# Altium PCB IO BOARD CERES.PcbDoc
Units mm, origin at the board's own origin, x right, y up, seen from the top; angles counter-clockwise.
Board outline 90 x 52 mm, 2 copper layers (Top Layer, Bottom Layer), stack 1.671 mm thick; 47 components, 30 nets, 158 pads, 0 vias.
Unrouted connection lines stored in the file: 6.
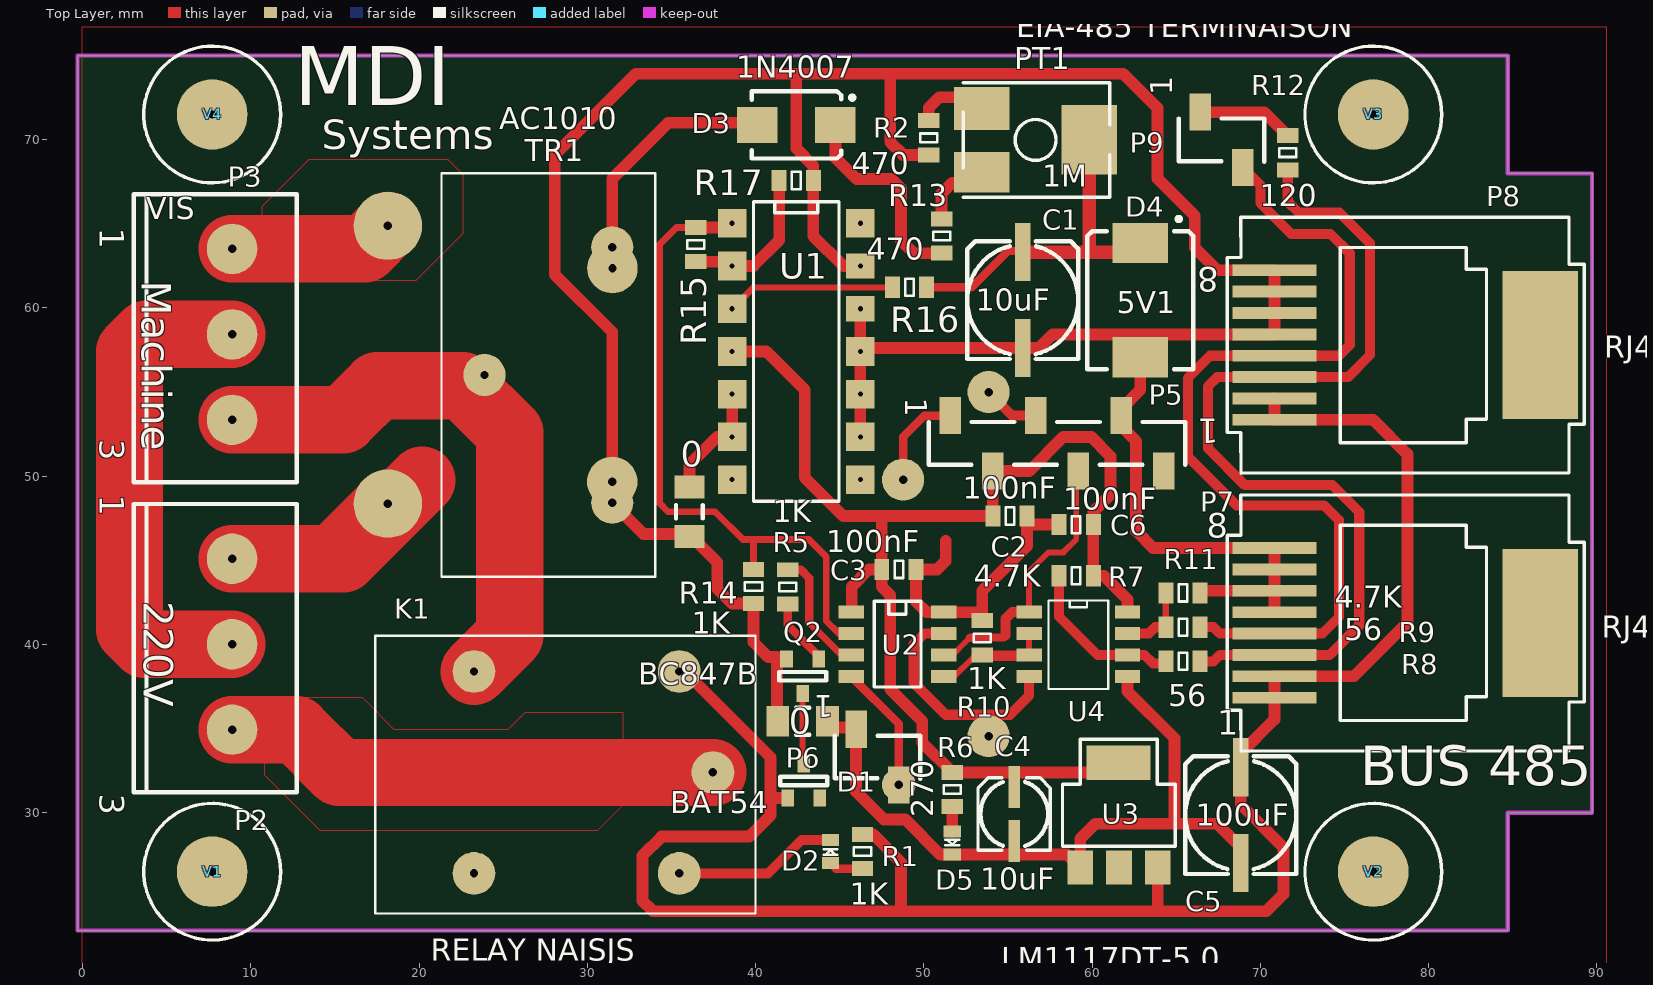
[diagram p0: Top Layer view]
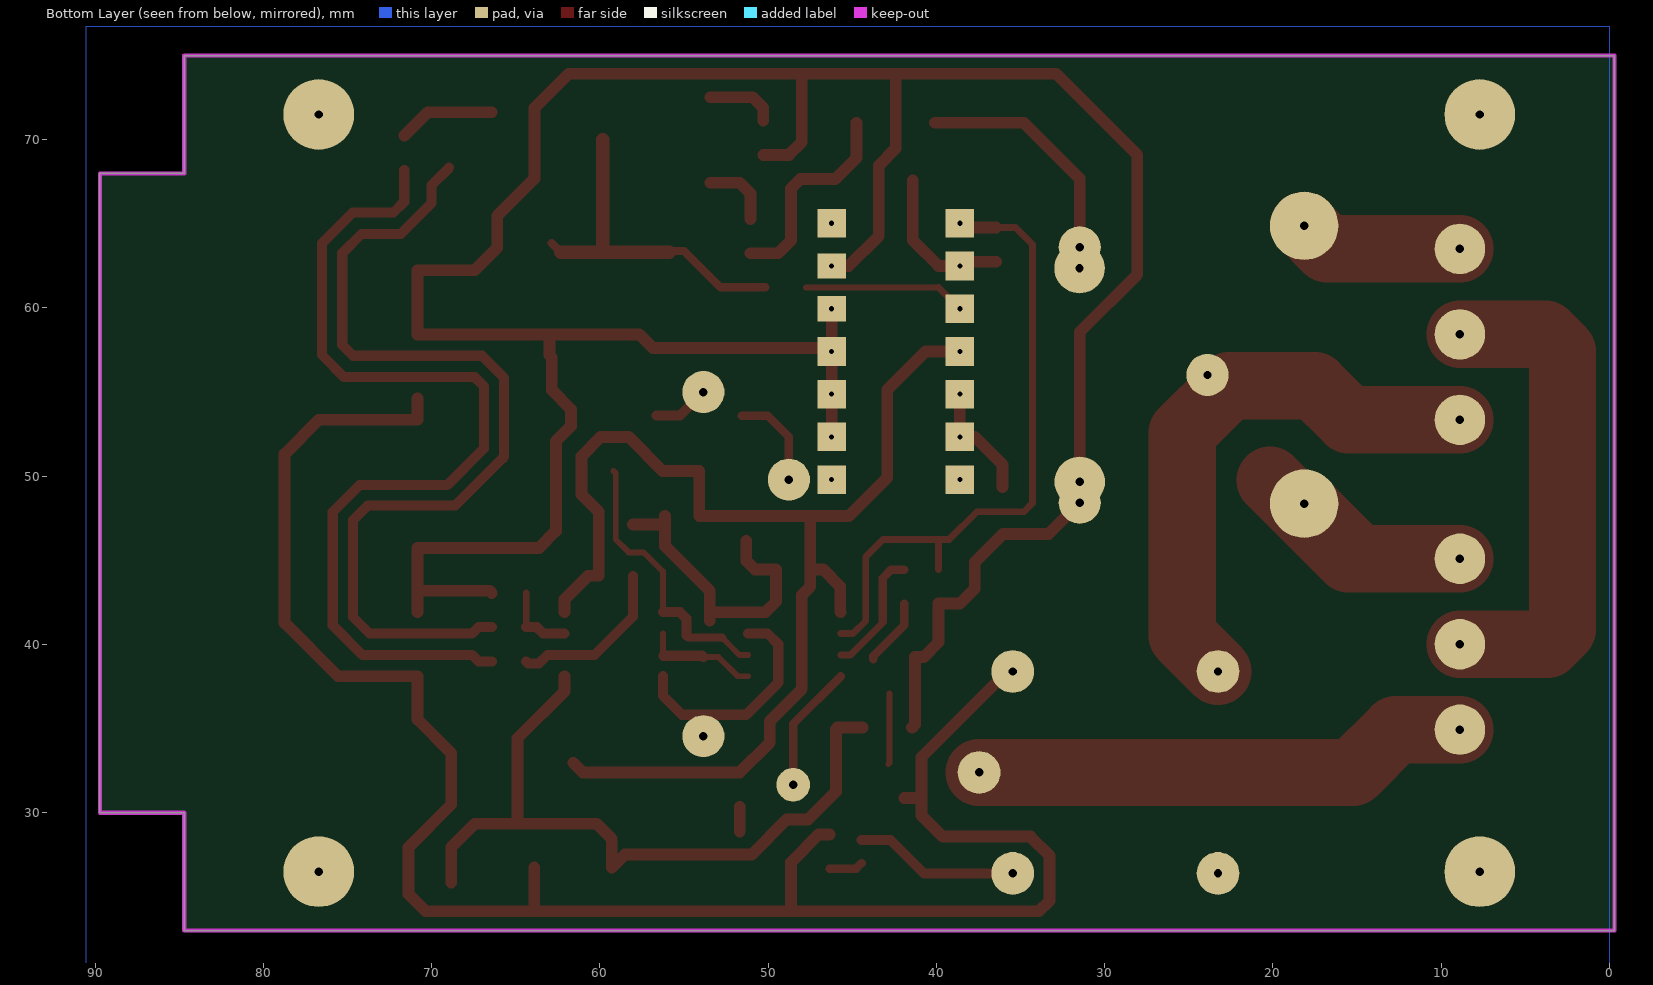
[diagram p1: Bottom Layer view, seen from below]
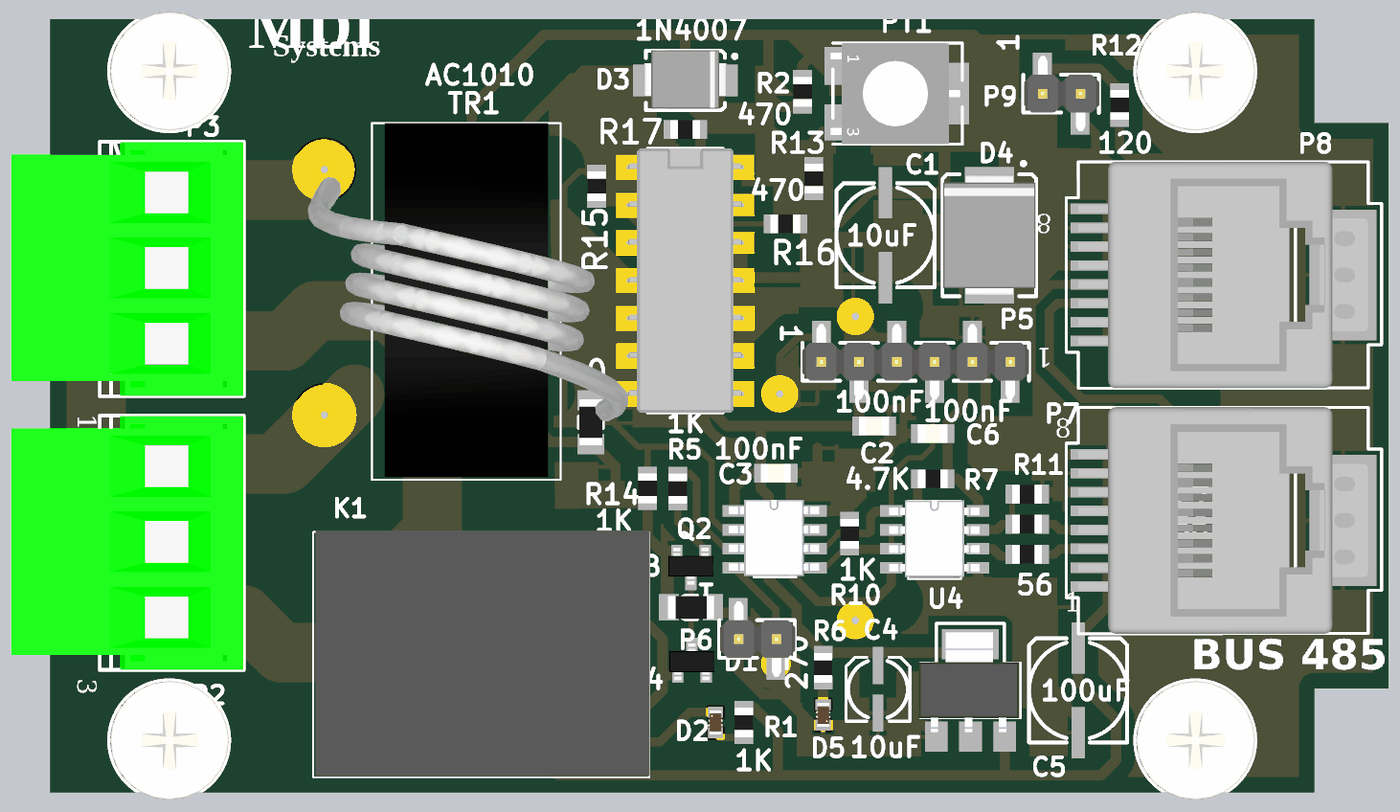
[diagram p2: 3D render of the assembled board from above, using the file's embedded part models]

## Layer stack, top to bottom
Top Solder: solder mask 0.0102, Solder Resist, Dk 3.5
Top Layer: signal copper 0.0356
Dielectric1: core 1.6, FR-4, Dk 4.8
Bottom Layer: signal copper 0.0356
Bottom Solder: solder mask 0.0102, Solder Resist, Dk 3.5

## Board outline
-0.291,22.987 -0.291,74.987 84.709,74.987 84.709,67.987 89.709,67.987 89.709,29.987 84.709,29.987 84.709,22.987

## Design rules (kind name [scope] priority, off if disabled: settings)
Clearance Clearance_3 [InNet('NetP3_3')] p1: gap=1
Clearance Clearance_2 [InPolygon vs (InComponent('Q1') OR InComponent('U1'))] p2: gap=1.3
Clearance Clearance_1 [InPolygon] p3: gap=0.9
Clearance [All] p4: gap=0.3
DiffPairsRouting [All] p1: maxlimit=0.9 minlimit=0.254 mostfreqgap=0.6 toplayer_minwidth=0.381 toplayer_maxwidth=2 toplayer_prefwidth=0.6 bottomlayer_minwidth=0.381 bottomlayer_maxwidth=2 bottomlayer_prefwidth=0.6 maxuncoupledlength=12.7
FabricationTestPointUsage TestPointUsage [All] p1: valid=0 allowmultiple=FALSE
FabricationTestpoint Testpoint [All] p1: side=3 testpointundercomponent=TRUE minsize=1.016 maxsize=2.54 preferedsize=1.524 minholesize=0 maxholesize=1.016 preferedholesize=0.813 testpointgrid=0.025 allowsidetop=TRUE allowsidebottom=TRUE usegrid=TRUE gridtolerance=0
HoleSize [All] p1: absolutevalues=TRUE maxlimit=5 minlimit=0.025 maxpercent=80.000 minpercent=20.000
MinimumSolderMaskSliver [All] p1: minsoldermaskwidth=0
PolygonConnect [All] p1: connectstyle=Relief reliefconductorwidth=0.254 reliefentries=4 polygonreliefangle="90 Angle" airgapwidth=0.254
RoutingVias [All] p1: holewidth=0.6 width=1.27 viastyle="Through Hole" minholewidth=0.5 minwidth=1.27 maxholewidth=0.9 maxwidth=1.27
SilkToSolderMaskClearance SilkscreenOverComponentPads [IsPad] p1: minsilkscreentomaskgap=0 clearancetoexposedcopper=TRUE
SolderMaskExpansion [All] p1: expansion=0
Width Width_4 [(InNet('D_N') OR InNet('D_P'))] p1: maxlimit=2 minlimit=0.254 preferedwidth=0.6
Width Width_3 [InNet('+5')] p2: maxlimit=2 minlimit=0.254 preferedwidth=0.7
Width Width_2 [InNet('3.3')] p3: maxlimit=2 minlimit=0.254 preferedwidth=0.7
Width Width_1 [InNet('+12')] p4: maxlimit=2 minlimit=0.254 preferedwidth=0.7
Width "Schematic Width Constraint" [InNet('GND')] p5: maxlimit=2 minlimit=0.254 preferedwidth=0.55
Width [All] p6: maxlimit=6 minlimit=0.254 preferedwidth=0.6
23 further rules are at their usual default settings.

## Classes and differential pairs
component class "U_RS485 IO": C4 C5 C6 D5 P7 P8 P9 R6 R7 R8 R9 R10 R11 R12 U3 U4
component class "U_MCU IO": C2 C3 P5 P6 R14 U2 V1 V2 V3 V4
component class U_IO: C1 D1 D2 D3 D4 K1 P2 P3 PT1 Q2 R1 R2 R5 R13 R15 R16 R17 TR1 U1
differential pair D: +D_P -D_N

## Components (designator, comment, footprint, x,y, rotation, side; value= is the part's Value field where it differs from the comment)
0 "Comment" 1206 42.799,35.433 r180 top
0 "Comment" 1206 36.068,47.879 r90 top
C1 "10uF" Kemet_63 55.88,60.452 r270 top
C2 "100nF" C0805 55.118,47.625 r180 top
C3 "100nF" C0805 48.514,44.45 r180 top
C4 "10uF" KEMET_4 55.372,29.921 r270 top
C5 "100uF" KEMET_63 68.834,29.845 r270 top
C6 "100nF" C0805 59.055,47.117 r180 top
D1 "BAT54" SOT23 42.862,31.877 r180 top
D2 "HSMH-C190" 0603-LEDR 44.45,27.686 r90 top
D3 "1N4007" DO214AA 42.418,70.866 r0 top
D4 "5V1" DO214AB 62.865,60.452 r270 top
D5 "HSMH-C190" 0603-LEDR 51.689,28.194 r270 top
K1 "RELAY NAISJS" RELAIG5L 37.465,32.385 r180 top
P2 "220VAC IN" CO3P508 8.89,45.085 r270 top
P3 "Alimentation Machine" CO3P508 8.89,63.5 r270 top
P5 "M20-8770642" M20_1X6 57.912,51.943 r0 top
P6 "Header 2" M20_1X2 47.244,33.303 r0 top
P7 "RJ45" MOLEX-RJ45_855135013 78.74,41.275 r180 top
P8 "RJ45" MOLEX-RJ45_855135013 78.74,57.785 r180 top
P9 "EIA-485 TERMINAISON" M20_1X2 67.691,69.977 r0 top
PT1 "1M" 3361P 56.642,69.977 r270 top
Q2 "BC847B" SOT23 42.799,38.1 r0 top
R1 "1K" R0805 46.355,27.686 r90 top
R2 "470" R0805 50.292,70.104 r270 top
R5 "1K" R0805 41.91,43.417 r90 top
R6 "270" R0805 51.689,31.369 r90 top
R7 "4.7K" R0805 59.055,44.069 r0 top
R8 "56" R0805 65.405,38.989 r0 top
R9 "56" R0805 65.405,41.021 r0 top
R10 "1K" R0805 53.467,40.386 r270 top
R11 "4.7K" R0805 65.405,43.053 r180 top
R12 "120" R0805 71.628,69.215 r270 top
R13 "470" R0805 51.054,64.262 r270 top
R14 "1K" R0805 39.878,43.434 r90 top
R15 "220K" R0805 36.449,63.754 r270 top
R16 "1K" R0805 49.149,61.214 r0 top
R17 "1K" R0805 42.418,67.564 r180 top
TR1 "AC1010" TR-AC10XX 27.686,56.007 r90 top
U1 "MCP6044-E/P" 14DIP300 38.608,65.024 r270 top
U2 "PIC12F1822/40" SO-8 45.682,41.91 r0 top
U3 "LM1117DT-5.0" SOT223 61.595,29.845 r0 top
U4 "ADM4851ARZ" SOIC8 59.182,40.005 r0 top
V1 "VIS" VIS42 7.709,26.487 r0 top
V2 "VIS" VIS42 76.709,26.487 r0 top
V3 "VIS" VIS42 76.709,71.487 r0 top
V4 "VIS" VIS42 7.709,71.487 r0 top

## Footprints (in the part's own frame and the unit in brackets; to place one, negate y for a bottom-side part, rotate by r counter-clockwise, add the part's x,y. Pads: shape width x height; smd on the part's side, far side on the other; paste and mask are expansions set on the pad)
14DIP300 [mm]
  rect 1.7x1.7 hole 0.3: 1(0,0) 2(2.54,0) 3(5.08,0) 4(7.62,0) 5(10.16,0) 6(12.7,0) 7(15.24,0) 8(15.24,7.62) 9(12.7,7.62) 10(10.16,7.62) 11(7.62,7.62) 14(0,7.62)
  rect 1.5x1.7 hole 0.3: 12(5.08,7.62) 13(2.54,7.62)
  silkscreen extent -1.27,1.27 16.51,6.35, body extent -1.27,0 16.51,7.62, height 3
0603-LEDR [mm]
  rect 0.725x1.016 smd paste+0 mask+0.12: 1(-0.69,0) 2(0.69,0)
  silkscreen extent -0.18,-0.41 0.13,0.41, body extent -0.8,-0.4 0.8,0.4, height 0.69
1206 [mm]
  rect 1.35x1.8 smd: 1(-1.475,0) 2(1.475,0)
  silkscreen extent -0.4,-0.8 0.4,0.8, body extent -1.55,-0.76 1.55,0.79, height 0.57
3361P [mm] "Résistance ajustable Bourns"
  rect 1.2x3.3 smd: 1(-2.54,-3.2) 2(0,3.2) 3(2.54,-3.2)
  silkscreen extent -3.4,-4.3 3.4,4.4, body extent -3.4,-4.45 3.4,4.25, height 4.88
C0805 [mil]
  rect 35x50 smd: 1(-40,0) 2(40,0)
  silkscreen extent -10,-20 10,20, body extent -39,-25 40,25, height 56
CO3P508 [mm]
  round 3 hole 0.5: 1(0,0) 2(5.08,0) 3(10.16,0)
  silkscreen extent -3.25,-5.84 13.87,3.84, body extent -3.22,-11.79 13.84,3.86, height 22.32
DO214AA [mm] "Molded Diode, 2-Leads, Body 5,4x3,6mm, IPC Medium Density"
  rect 2.4x2.15 smd: 1(-2.325,0) 2(2.325,0)
  silkscreen extent -2.65,-2 3.45,2, body extent -2.78,-1.9 2.79,2.03, height 2.32
DO214AB [mm] "Molded Diode, 2-Leads, Body 7,9x5,9mm, IPC Medium Density"
  rect 2.4x3.3 smd: 1(3.4,0) 2(-3.4,0)
  silkscreen extent -4.95,-3.15 4.1,3.15, body extent -4.05,-3.11 4.06,3.11, height 2.32
KEMET_4 [mm]
  rect 2.5x0.7 smd: 1(-1.6,0) 2(1.6,0)
  silkscreen extent -2.15,-2.15 2.15,2.15, body extent -2.6,-2.25 2.6,2.25, height 4.6
Kemet_63 [mm]
  rect 3.45x0.9 smd: 1(-2.85,0) 2(2.85,0)
  silkscreen extent -3.5,-3.3 3.5,3.3, body extent -3.5,-3.4 3.5,3.4, height 8.7
KEMET_63 [mm]
  rect 3.45x0.9 smd: 1(-2.85,0) 2(2.85,0)
  silkscreen extent -3.5,-3.3 3.5,3.3, body extent -3.5,-3.4 3.5,3.4, height 8.7
M20_1X2 [mm] "Connecteur Harwin_M20-8770242"
  rect 1.27x2.2 smd: 1(-1.27,1.65) 1(-1.27,1.65) 2(1.27,-1.65)
  silkscreen extent -2.54,-1.3 2.54,1.27, body extent -2.5,-2.54 2.58,2.54, height 9.95
M20_1X6 [mm] "Connecteur Harwin_M20-8770642"
  rect 1.27x2.2 smd: 1(-6.35,1.65) 1(-6.35,1.65) 2(-3.81,-1.65) 3(-1.27,1.65) 4(1.27,-1.65) 5(3.81,1.65) 6(6.35,-1.65)
  silkscreen extent -7.62,-1.27 7.62,1.27, body extent -7.62,-2.54 7.62,2.54, height 9.95
MOLEX-RJ45_855135013 [mm]
  rect 5x0.7 smd: 1(7.9,4.445) 2(7.9,3.175) 3(7.9,1.905) 4(7.9,0.635) 5(7.9,-0.635) 6(7.9,-1.905) 7(7.9,-3.175) 8(7.9,-4.445)
  rect 4.5x8.8 smd: 9(-7.9,0)
  silkscreen extent -10.5,-7.6 10.7,7.62, body extent -9.59,-7.62 9.89,7.62, height 12.87
R0805 [mil]
  rect 35x50 smd: 1(-40,0) 2(40,0)
  silkscreen extent -10,-20 10,20, body extent -39,-24 39,25, height 20
RELAIG5L [mm]
  round 2.54 hole 0.5: 1(0,0) 2(2,-6) 3(14.2,-6) 4(14.2,6) 5(2,6)
  silkscreen extent -2.54,-8.13 20.07,8.38, body extent -2.57,-8.2 19.93,8.3, height 19
SO-8 [mil]
  rect 59.1x30.3 smd: 1(0,0) 2(0,-50) 3(0,-100) 4(0,-150) 5(216.5,-150) 6(216.5,-100) 7(216.5,-50) 8(216.5,0)
  silkscreen extent 53,-175 163,26, body extent -13,-172 226,30, height 69
SOIC8 [mil]
  rect 59.1x30.3 smd: 1(-115,75) 2(-115,25) 3(-115,-25) 4(-115,-75) 5(115,-75) 6(115,-25) 7(115,25) 8(115,75)
  silkscreen extent -70,-105 70,102, body extent -120,-100 119,103, height 69
SOT23 [mil]
  rect 30x40 smd: 1(37.5,40) 2(-37.5,40) 3(0,-40)
  silkscreen extent -55,-10 55,10, body extent -60,-45 60,53, height 47
SOT223 [mil]
  rect 60x80 smd: 1(-90.6,-122.5) 2(0,-122.5) 3(90.6,-122.5)
  rect 150x80 smd: 4(-0.6,122.5)
  silkscreen extent -132,-73 132,177, body extent -137,-111 129,154, height 73
TR-AC10XX [mm]
  round 4.064 hole 0.5 mask+0.127: 1(-7.647,9.539) 2(8.863,9.539)
  round 2.5 hole 0.5 mask+0.127: 3(-7.593,-3.796) 4(7.593,-3.796) 5(0,3.796)
  silkscreen extent -11.99,-6.35 11.99,6.35, body extent -11.81,-10.85 11.99,10.64, height 28.33
VIS42 [mm]
  round 4.199 hole 0.5: 1(0,0)
  silkscreen extent -4.06,-4.06 4.06,4.06, body extent -3.97,-4 4.03,4, height 3.09

## Part data
C1 C5: library part "Cap Pol 100uF", "Polarized Capacitor"
C2 C3 C6: library part "Cap 0805 100nF", "Capacitor"
C4: library part "Cap Pol1", "Polarized Capacitor"
D1: "Schottky Barrier Diode"
D2 D5: "Surface Mount Chip LED, Red"
D3: library part D
D4: library part DZ
P2 P3: library part "Header 3", "Header, 3-Pin"
P5: library part "Header 6", "Header, 6-Pin"
P6: "Header, 2-Pin"
P7 P8: library part "Header 8", "Header, 8-Pin"
P9: library part "Header 2", "Header, 2-Pin"
PT1: library part RV
Q2: library part "NPN SOT23"
R1 R5 R6 R10 R14 R15 R16 R17: library part "Resistor 0805 1K", "Resistor"
R2 R13: library part R
R7 R11: library part "Resistor 0805 4.7K", "Resistor"
R8 R9: library part "Resistor 0805 56", "Resistor"
R12: library part "Resistor 0805 120", "Resistor"
U1: "600 nA, Rail-to-Rail Input/Output Operational Amplifier, 14-Pin PDIP, Extended Temperature"
U2: library part PIC18(L)F22/40, "PIC12F1822/40-I/SN - MICRO 8 BITS FLASH 8SOIC2K 2K 4K"
U3: "800mA Low-Dropout Linear Regulator, 3-pin TO-252"
U4: library part MAX485ESA, "Low-Power, Slew-Rate-Limited RS-485/RS-422 Transceiver"

## Free pads (board coordinates)
  round 3 hole 0.5: 0(31.482,49.657) 0(31.496,62.357)
  round 2.5 hole 0.5: 0(53.848,34.544) 1(53.848,54.991) 4(48.768,49.784)
  rect 3.3x1.6 smd: 1(53.442,71.374) 2(53.442,68.453) 3(59.842,71.247) 4(59.842,68.707)
  round 2 hole 0.5: 3(48.514,31.653)

## Nets (pads, with @x,y where several pads share a name; then routed paths per layer and width w, separated by ;. In a path a pad name is that pad's centre, name@x,y a point inside that pad or via, vN(x,y) a via of type N, cw(c..) or ccw(c..) an arc to the next point about the centre after c; other vN are vias at no path point)
+5: C2.2 C3.2 C4.1 C6.1 P5.2 R6.2 R7.2 U1.4 U2.1 U3.4 U4.8 | length 75.4
  Top Layer w0.7: U1.4 40.64,57.404 42.926,55.118 42.926,49.911 45.212,47.625 45.974,47.625 47.371,47.625 ; U2.1 45.72,41.948 45.72,43.434 46.736,44.45 C3.2 ; U3.4 61.008,32.385 R6.2 49.911,34.163 49.911,35.433 48.006,37.338 48.006,42.926 47.498,43.434 C3.2 ; U4.8 62.103,42.672 60.706,44.069 R7.2 C6.1 60.071,47.879 61.087,48.895 61.087,51.181 59.944,52.324 58.293,52.324 56.262,50.293 P5.2 C2.2 47.371,47.625 ; 47.371,47.625 47.498,47.498 C3.2
+12: C5.1 D1.1 K1.2 P7.1 P7.2 P8.1 P8.2 R1.2 U3.3 | length 114.7
  Top Layer w0.7: K1.2 35.783,38.385 40.894,33.274 40.894,30.861 ; D1.1 40.894,30.861 ; R1.2 46.99,28.702 48.641,27.051 48.641,24.13 ; U3.3 63.896,24.145 63.881,24.13 ; P8.2 P8.1 76.708,53.34 78.74,51.308 78.74,41.275 75.565,38.1 P7.2 P7.1 70.84,35.534 68.834,33.528 C5.1 68.834,30.48 71.374,27.94 71.374,25.146 70.358,24.13 63.881,24.13 ; 40.894,30.861 40.894,29.845 39.624,28.575 34.417,28.575 33.274,27.432 33.274,24.765 33.909,24.13 48.641,24.13 ; 48.641,24.13 63.881,24.13
D_N: P7.3 P8.3 R8.2 R12.2 | length 56.2
  Top Layer w0.6: R8.2 67.213,38.989 67.593,39.37 P7.3 74.117,39.37 75.876,41.129 75.876,47.868 74.636,49.109 74.284,49.46 69.077,49.46 66.889,51.649 66.889,55.332 67.437,55.88 67.974,55.88 P8.3 75.202,55.88 76.511,57.189 76.511,63.842 74.694,65.659 72.263,65.659 71.628,66.294 R12.2
D_P: P7.4 P8.4 P9.2 R9.2 | length 54.8
  Top Layer w0.6: R9.2 67.213,41.021 67.594,40.64 P7.4 73.69,40.64 74.676,41.626 74.676,47.371 73.787,48.26 68.58,48.26 66.04,50.8 65.689,51.151 65.689,55.829 66.04,56.18 67.01,57.15 P8.4 74.676,57.15 75.311,57.785 75.311,63.246 74.168,64.389 71.836,64.389 70.007,66.218 70.007,67.281 P9.2
GND: 0.1 0.2 C1.2 C2.1 C3.1 C4.2 C5.2 C6.2 D4.1 D5.2 P5.5 P6.1 P7.5 P7.6 P7.7 P7.8 P8.5 P8.6 P8.7 P8.8 pad.0@31.482,49.657 Q2.2 R2.2 R10.1 R11.1 R14.1 R17.1 TR1.3 U1.5 U1.6 U1.9 U1.10 U1.11 U1.12 U1.13 U2.8 U3.1 U4.5 | length 251.9
  Top Layer w0.7: 0.2@36.068,49.354 36.068,50.673 37.719,52.324 U1.6 U1.5 ; 0.2@41.451,35.052 41.275,35.228 41.275,39.243 40.767,39.243 39.878,40.132 R14.1 38.608,42.418 37.719,43.307 37.719,44.88 36.041,46.558 33.338,46.558 TR1.3 31.482,58.561 28.067,61.976 28.067,69.088 32.893,73.914 42.418,73.914 ; 0.1@44.401,35.052 45.875,35.052 45.974,34.953 45.974,31.242 47.625,29.591 48.895,29.591 50.982,27.504 D5.2 58.523,27.504 U3.1 59.294,28.433 60.198,29.337 64.897,29.337 ; U1.9 U1.10 U1.11 ; U1.12 U1.11 ; U1.13 45.212,62.484 43.434,64.262 R17.1 43.434,68.453 42.418,69.469 42.418,73.914 ; R2.2 48.768,69.088 48.006,69.85 48.006,73.914 ; 51.308,46.15 51.308,44.958 50.8,44.45 C3.1 49.53,42.545 50.165,41.91 U2.8 53.467,41.91 ; R10.1 53.467,41.91 ; C2.1@56.134,47.117 C6.2 ; C2.1 56.134,45.847 53.467,43.18 53.467,41.91 ; U4.5 62.103,37.211 64.897,34.417 64.897,29.337 ; R11.1 66.548,43.18 P7.6 ; C5.2@68.834,25.852 68.834,27.94 67.437,29.337 64.897,29.337 ; P7.5 P7.6 ; 42.418,73.914 48.006,73.914 ; U1.11 46.426,57.602 C1.2 56.84,57.602 57.658,58.42 62.992,58.42 ; 48.006,73.914 61.849,73.914 63.881,71.882 63.881,67.691 66.103,65.468 66.103,63.563 67.437,62.23 P8.8 P8.7 P8.6 P8.5 62.992,58.42 ; 62.992,58.42 62.992,57.179 D4.1 62.865,55.118 61.722,53.975 P5.5 61.722,52.959 62.611,52.07 62.611,46.736 63.627,45.72 P7.8 P7.7 P7.6
M\C\L\R: P5.1 P6.2 pad.3@48.514,31.653 pad.4@48.768,49.784 U2.4 | length 13.5
  Top Layer w0.5: U2.4 48.514,35.268 P6.2 ; pad.4@48.768,49.784 48.768,52.324 50.037,53.593 P5.1@51.562,53.593
NetC1_1: C1.1 D4.2 pad.3@59.842,71.247 pad.4@59.842,68.707 PT1.2 R16.2 | length 20.6
  Top Layer w0.5: R16.2 52.832,61.214 54.991,63.373 55.809,63.373 C1.1 ; 59.69,63.302 59.842,63.454 ; D4.2@62.315,63.302 D4.2
  Top Layer w0.8: C1.1 59.69,63.302 D4.2@62.315,63.302 ; 59.842,63.454 PT1.2
NetD1_3: D1.3 D2.2 K1.5 Q2.3 | length 14.2
  Top Layer w0.35: Q2.3 42.799,32.957 D1.3 ; D2.2@44.323,28.503 D2.2
  Top Layer w0.6: K1.5 40.736,26.385 42.727,28.376 D2.2
NetD2_1: D2.1 R1.1 | length 2
  Top Layer w0.5: D2.1 44.776,26.67 R1.1
NetD3_1: D3.1 pad.0@31.496,62.357 TR1.4 | length 14.1
  Top Layer w0.7: TR1.4 31.482,67.677 34.798,70.993 D3.1@40.093,70.993
NetD3_2: D3.2 R13.2 | length 12.5
  Top Layer w0.7: D3.2@44.743,70.993 44.743,68.922 46.018,67.647 48.089,67.647 48.641,67.095 48.641,64.008 49.403,63.246 R13.2
NetD5_1: D5.1 R6.1 | length 1.5
  Top Layer w0.7: D5.1 R6.1
NetK1_1: K1.1 P2.3 | length 29.6
  Top Layer w4: P2.3 12.7,34.925 15.24,32.385 K1.1
NetK1_3: K1.3 P3.3 | length 33.6
  Top Layer w4: P3.3 15.494,53.34 17.526,55.372 22.606,55.372 25.4,52.578 25.4,40.52 K1.3
NetP2_1: P2.1 TR1.1 | length 20
  Top Layer w4: P2.1 14.873,45.085 TR1.1 ; 12.7,45.085 15.508,45.085 20.179,49.757
NetP3_1: P3.1 TR1.2 | length 9.8
  Top Layer w4: P3.1 16.778,63.5 TR1.2
NetP9_1: P9.1 R12.1 | length 5.8
  Top Layer w0.7: P9.1@66.421,71.627 70.232,71.627 R12.1
NetPT1_1: pad.1@53.442,71.374 PT1.1 R2.1 | length 4.2
  Top Layer w0.7: R2.1 50.292,71.882 50.927,72.517 PT1.1
NetPT1_3: pad.2 PT1.3 R13.1 | length 4.2
  Top Layer w0.7: R13.1 51.054,66.802 51.689,67.437 PT1.3
NetQ2_1: Q2.1 R5.1 | length 4
  Top Layer w0.5: R5.1 41.91,41.148 43.751,39.307 Q2.1
NetR5_2: R5.2 U2.3 | length 7.4
  Top Layer w0.4: 43.18,41.335 43.18,41.299 45.109,39.37 U2.3
  Top Layer w0.5: R5.2 42.689,44.433 43.18,43.942 43.18,41.335
NetR7_1: R7.1 R8.1 U4.6 | length 10
  Top Layer w0.6: R7.1 58.039,41.656 60.325,39.37 U4.6 63.119,39.37 63.627,38.862 64.262,38.862 R8.1
NetR9_1: R9.1 R11.2 U4.7 | length 4.5
  Top Layer w0.381: R9.1 R11.2
  Top Layer w0.6: U4.7 63.373,40.64 63.754,41.021 R9.1
NetR10_2: R10.2 U2.5 U4.2 U4.3 | length 6.9
  Top Layer w0.35: U2.5 51.816,38.1 52.959,39.243 R10.2@53.848,39.243 ; U4.3@56.21,39.319 U4.3 U4.2
  Top Layer w0.6: R10.2@53.848,39.243 53.924,39.319 U4.3@56.21,39.319
NetR14_2: R14.2 R15.1 U1.1 U2.2 | length 38.8
  Top Layer w0.4: R15.1 35.306,64.77 34.29,63.754 34.29,48.387 34.798,47.879 37.592,47.879 39.243,46.228 39.878,46.228 ; R14.2 39.878,46.228 ; U2.2 44.958,40.64 44.196,41.402 44.196,45.212 43.18,46.228 39.878,46.228
  Top Layer w0.7: R15.1 38.354,64.77 U1.1
NetR15_2: R15.2 R17.2 U1.2 | length 9.2
  Top Layer w0.7: R15.2 38.354,62.738 U1.2 39.878,62.484 41.402,64.008 R17.2
NetR16_1: R16.1 U1.3 | length 9.7
  Top Layer w0.35: 39.878,61.214 R16.1@47.752,61.214
  Top Layer w0.4: U1.3 39.878,61.214
PGEC1: P5.4 U2.6 U4.1 | length 16.8
  Top Layer w0.35: U2.6 51.718,39.37 52.451,40.103 ; 52.45,40.104 52.722,40.376 ; U4.1 56.261,44.323 57.404,45.466 58.293,45.466 59.055,46.228 59.055,50.166 P5.4
  Top Layer w0.5: 52.722,40.376 52.753,40.407 54.758,40.407 54.864,40.513
  Top Layer w0.6: 54.864,40.513 54.864,41.529 55.245,41.91 U4.1
PGED1: P5.3 pad.0@53.848,34.544 pad.1@53.848,54.991 U2.7 U4.4 | length 17
  Top Layer w0.6: U2.7 50.038,40.64 49.403,40.005 49.403,37.719 51.308,35.814 55.118,35.814 56.261,36.957 U4.4 ; pad.1@53.848,54.991 55.245,53.594 P5.3 P5.3
TERRE: P2.2 P3.2 | length 29.5
  Top Layer w4: P2.2 7.874,40.005 3.683,40.005 2.794,40.894 2.794,57.404 3.81,58.42 P3.2
pads on no net: D1.2 K1.4 P5.6 P7.9 P8.9 TR1.5 U1.7 U1.8 U1.14 U3.2 V1.1 V2.1 V3.1 V4.1

## Polygon pours and split planes (outlines as drawn)
GND on Bottom Layer "Top Layer-No Net1" (solid, remove dead copper, shelved, pour order 7): 0,0 0,76.708 90.551,76.708 90.551,0
GND on Top Layer "Top Layer-No Net" (solid, remove dead copper, shelved, pour order 5): 0,0 0,76.708 90.551,76.708 90.551,0
NetK1_1 on Top Layer "Mid-Layer 1-No Net" (solid, remove dead copper, shelved, pour order 8): 10.922,35.179 10.795,35.052 10.795,33.274 10.795,32.258 14.097,28.956 30.099,28.956 30.607,28.956 32.131,30.48 32.131,35.941 26.289,35.941 25.4,35.052 25.273,34.925 19.304,34.925 18.542,34.925 16.764,36.703 16.637,36.83 12.319,36.83
no net on Top Layer "Mid-Layer 1-No Net" (solid, remove dead copper, shelved, pour order 6): 10.668,61.595 10.668,66.04 13.462,68.834 21.717,68.834 22.606,67.945 22.606,64.389 19.812,61.595

## Keep-outs
Keep-Out Layer:
  the board outline again, w0.254

## Other copper
Top Layer:
  pour cut-out: 33.147,74.168 33.655,42.037 40.767,42.164 40.767,23.876 0.254,23.749 0.254,74.168
  text "CUIVRE TOP" at 179.989,-113.157 h4
Bottom Layer:
  text "CUIVRE BOTTOM" at -51.532,-113.792 h4

## Silkscreen, mask and mechanical layers (free items; w line width, h text height)
Top Overlay:
  text "MDI" at 12.573,70.866 h6
  text "Systems" at 14.224,68.834 h3
  text "Machine" at 2.921,61.595 h3 r270
  text "220V" at 3.048,42.545 h3 r270
  text "BUS 485" at 75.946,30.861 h4
  text "I/O BOARD" at 36.449,16.637 h4
  text "PLAN D'EQUIPEMENT TOP" at 180.116,-113.157 h4
Bottom Overlay:
  text "PLAN D'EQUIPEMENT BOTTOM" at -34.514,-113.792 h4
  text ".Layer_Name" at 2.189,-122.682 h2
Top Paste:
  text "PATE A BRASER TOP" at 180.37,-113.411 h4
Bottom Paste:
  text "PATE A BRASER BOTTOM" at -34.768,-113.792 h4
Top Solder:
  text "VERNIS EPARGNE TOP" at 180.116,-113.411 h4
Bottom Solder:
  text "VERNIS EPARGNE BOTTOM" at -38.705,-114.046 h4
Drill Guide:
  lines w0.254: 7.709,26.487 76.709,26.487 76.709,71.487 7.709,71.487 7.709,26.487
Fond de plan Bottom:
  circle w0.127: c37.442,-88.392 r2
  circle w0.127: c37.442,-88.392 r3
  lines w0.127: -127.351,-61.468 -122.271,-61.468 ; -127.351,9.017 -122.271,9.017 ; -127.351,79.502 -122.271,79.502 ; -105.304,-127.037 -105.304,-117.032 ; -78.075,-131.953 -78.075,-126.873 ; -78.075,144.907 -78.075,149.987 ; -28.799,-131.953 -28.799,-126.873 ; -28.799,144.907 -28.799,149.987 ; -8.306,-117.032 -8.306,-102.037 ; 20.35,-131.953 20.35,-126.873 ; 20.35,144.907 20.35,149.987 ; 22.702,-121.774 66.863,-121.774 ; 22.702,-117.017 66.863,-117.017 ; 22.702,-112.272 66.863,-112.272 ; 22.702,-107.528 66.863,-107.528 ; 22.702,-103.189 66.832,-103.189 ; 33.685,-88.392 43.291,-88.392 ; 37.442,-92.06 37.442,-84.711 ; 37.699,-127.037 37.699,-103.189 ; 44.353,-88.392 46.766,-88.392 ; 47.782,-88.392 60.055,-88.392 ; 52.693,-127.037 52.693,-103.189 ; 69.499,-131.953 69.499,-126.873 ; 69.499,144.907 69.499,149.987 ; 118.775,-131.953 118.775,-126.873 ; 118.775,144.907 118.775,149.987 ; 167.924,-131.953 167.924,-126.873 ; 167.924,144.907 167.924,149.987 ; 217.073,-131.953 217.073,-126.873 ; 217.073,144.907 217.073,149.987 ; 261.269,-61.468 266.349,-61.468 ; 261.269,9.017 266.349,9.017 ; 261.269,79.502 266.349,79.502 ; -127.351,-131.953 -127.351,149.987 266.349,149.987 266.349,-131.953 -127.351,-131.953 ; -122.271,-126.873 -122.271,144.907 261.269,144.907 261.269,-126.873 -122.271,-126.873 ; 50.056,-91.392 57.055,-90.392 57.055,-86.392 50.055,-85.392 50.056,-91.392
  lines w0.5: -122.297,-117.032 22.702,-117.032 ; -122.297,-102.037 22.702,-102.037 ; -122.297,-93.295 22.702,-93.295 66.862,-93.295 ; -36.906,-127.037 -36.906,-117.032 ; -22.296,-117.032 -22.296,-102.037 ; -22.296,-107.04 22.702,-107.04 ; -22.198,-112.043 5.696,-112.043 22.702,-112.043 ; 5.696,-117.032 5.696,-102.037 ; 22.702,-127.037 22.702,-73.022 ; 22.702,-103.189 66.578,-103.189 ; 22.702,-98.458 66.578,-98.458 ; 22.702,-83.489 66.862,-83.488 ; 37.699,-103.189 37.699,-98.509 ; 52.693,-103.189 52.693,-98.5 ; -122.297,-127.037 66.863,-127.022 66.862,-73.007 -122.297,-73.022 -122.297,-127.037
  text "8" at -102.129,146.558 h1.78
  text "7" at -53.107,146.558 h1.78
  text "6" at -3.577,146.558 h1.78
  text "5" at 45.445,146.558 h1.78
  text "4" at 94.721,146.558 h1.78
  text "3" at 144.014,146.558 h1.78
  text "2" at 193.273,146.558 h1.78
  text "1" at 242.312,146.558 h1.78
  text "A" at -124.176,112.573 h1.78
  text "A" at 264.444,112.573 h1.78
  text "B" at -124.176,41.961 h1.78
  text "B" at 264.444,41.961 h1.78
  text "C" at -124.176,-28.651 h1.78
  text "C" at 264.444,-28.651 h1.78
  text "ECHELLE : 1" at 64.546,-78.994 h3
  text "MDI" at -46.355,-82.55 h8
  text "Systems" at -47.879,-86.614 h4
  text "MODIFICATIONS" at 52.862,-96.774 h3
  text "Ce document est la propriété de MDI System" at -29.307,-96.901 h3
  text "D" at -124.176,-98.755 h1.78
  text "D" at 264.444,-98.755 h1.78
  text "Il ne peut être reproduit ou communiqué sans son autorisation" at -15.718,-100.457 h3
  text "Visa" at 32.923,-101.6 h3
  text "Date" at 47.782,-101.6 h3
  text "Indice" at 62.895,-101.6 h3
  text "NOM" at 1.681,-105.537 h3
  text "DATE" at -11.282,-105.664 h3
  text "DESIGNATION : I/O BOARD" at -24.363,-106.807 h4
  text "Etablie" at 17.937,-110.363 h3
  text "13/09/13" at -11.028,-110.617 h2.5
  text "SB" at 0.529,-110.998 h3
  text "Vérifiée" at 18.445,-115.443 h3
  text "MATIERE :" at 19.325,-120.015 h3
  text "FEUILLE" at -109.825,-120.396 h3
  text "N°" at -38.197,-123.698 h6
  text "1/1" at -112.492,-124.841 h1.3
  text "8" at -102.129,-130.302 h1.78
  text "7" at -53.107,-130.302 h1.78
  text "6" at -3.577,-130.302 h1.78
  text "5" at 45.445,-130.302 h1.78
  text "4" at 94.721,-130.302 h1.78
  text "3" at 144.014,-130.302 h1.78
  text "2" at 193.273,-130.302 h1.78
  text "1" at 242.312,-130.302 h1.78
Fond de plan:
  circle w0.127: c101.555,-88.392 r2
  circle w0.127: c101.555,-88.392 r3
  lines w0.127: -127.351,-61.468 -122.271,-61.468 ; -127.351,9.017 -122.271,9.017 ; -127.351,79.502 -122.271,79.502 ; -78.075,-131.953 -78.075,-126.873 ; -78.075,144.907 -78.075,149.987 ; -28.926,-131.953 -28.926,-126.873 ; -28.926,144.907 -28.926,149.987 ; 20.223,-131.953 20.223,-126.873 ; 20.223,144.907 20.223,149.987 ; 69.499,-131.953 69.499,-126.873 ; 69.499,144.907 69.499,149.987 ; 72.135,-121.774 116.295,-121.774 ; 72.135,-117.017 116.295,-117.017 ; 72.135,-112.272 116.295,-112.272 ; 72.135,-107.528 116.295,-107.528 ; 72.166,-103.189 116.295,-103.189 ; 78.942,-88.392 91.216,-88.392 ; 86.304,-127.037 86.304,-103.189 ; 92.232,-88.392 94.645,-88.392 ; 95.706,-88.392 105.313,-88.392 ; 101.299,-127.037 101.299,-103.189 ; 101.555,-92.06 101.555,-84.711 ; 118.648,-131.953 118.648,-126.873 ; 118.648,144.907 118.648,149.987 ; 147.304,-117.032 147.304,-102.037 ; 167.797,-131.953 167.797,-126.873 ; 167.797,144.907 167.797,149.987 ; 217.073,-131.953 217.073,-126.873 ; 217.073,144.907 217.073,149.987 ; 244.301,-127.037 244.301,-117.032 ; 261.269,-61.468 266.349,-61.468 ; 261.269,9.017 266.349,9.017 ; 261.269,79.502 266.349,79.502 ; -127.351,-131.953 266.349,-131.953 266.349,149.987 -127.351,149.987 -127.351,-131.953 ; -122.271,-126.873 261.269,-126.873 261.269,144.907 -122.271,144.907 -122.271,-126.873 ; 81.942,-90.392 81.942,-86.392 88.942,-85.392 88.942,-91.392 81.942,-90.392
  lines w0.5: 72.136,-93.295 116.295,-93.295 261.294,-93.295 ; 72.136,-83.488 116.295,-83.489 ; 72.419,-103.189 116.295,-103.189 ; 72.419,-98.458 116.295,-98.458 ; 86.304,-103.189 86.304,-98.5 ; 101.299,-103.189 101.299,-98.509 ; 116.295,-127.037 116.295,-73.022 ; 116.295,-117.032 261.294,-117.032 ; 116.295,-112.043 133.301,-112.043 161.195,-112.043 ; 116.295,-107.04 161.294,-107.04 ; 116.295,-102.037 261.294,-102.037 ; 133.301,-117.032 133.301,-102.037 ; 161.294,-117.032 161.294,-102.037 ; 180.095,-127.037 180.095,-117.032 ; 72.135,-127.022 72.135,-73.007 261.294,-73.022 261.294,-127.037 72.135,-127.022
  text "1" at -103.314,146.558 h1.78
  text "2" at -54.275,146.558 h1.78
  text "3" at -5.016,146.558 h1.78
  text "4" at 44.277,146.558 h1.78
  text "5" at 93.553,146.558 h1.78
  text "6" at 142.575,146.558 h1.78
  text "7" at 192.105,146.558 h1.78
  text "8" at 241.127,146.558 h1.78
  text "A" at -125.446,112.573 h1.78
  text "A" at 263.174,112.573 h1.78
  text "B" at -125.446,41.961 h1.78
  text "B" at 263.174,41.961 h1.78
  text "C" at -125.446,-28.651 h1.78
  text "C" at 263.174,-28.651 h1.78
  text "ECHELLE : 1" at 74.325,-79.121 h3
  text "MDI" at 175.895,-81.788 h8
  text "Systems" at 177.673,-86.106 h4
  text "MODIFICATIONS" at 86.009,-96.901 h3
  text "Ce document est la propriété de MDI System" at 168.305,-96.901 h3
  text "D" at -125.446,-98.755 h1.78
  text "D" at 263.174,-98.755 h1.78
  text "Il ne peut être reproduit ou communiqué sans son autorisation" at 154.716,-100.457 h3
  text "Indice" at 76.103,-101.6 h3
  text "Date" at 91.216,-101.6 h3
  text "Visa" at 106.075,-101.6 h3
  text "NOM" at 137.317,-105.537 h3
  text "DATE" at 150.28,-105.664 h3
  text "DESIGNATION : I/O BOARD" at 163.361,-106.807 h4
  text "Etablie" at 121.061,-110.363 h3
  text "13/09/13" at 150.026,-110.617 h2.5
  text "SB" at 138.469,-110.998 h3
  text "Vérifiée" at 120.553,-115.443 h3
  text "MATIERE :" at 119.673,-120.015 h3
  text "FEUILLE" at 248.823,-120.396 h3
  text "N°" at 183.037,-123.444 h6
  text "1/1" at 251.49,-124.841 h1.3
  text "1" at -103.314,-130.302 h1.78
  text "2" at -54.275,-130.302 h1.78
  text "3" at -5.016,-130.302 h1.78
  text "4" at 44.277,-130.302 h1.78
  text "5" at 93.553,-130.302 h1.78
  text "6" at 142.575,-130.302 h1.78
  text "7" at 192.105,-130.302 h1.78
  text "8" at 241.127,-130.302 h1.78
Drill Drawing:
  lines w0.15: 180.598,95.135 180.598,98.635 183.718,98.635 183.718,95.135 180.598,95.135 ; 187.098,84.635 187.098,88.135 190.218,88.135 190.218,84.635 187.098,84.635 ; 187.598,95.135 190.718,95.135 190.718,98.635 187.598,98.635 187.598,95.135 ; 194.478,114.135 197.598,114.135 197.598,117.635 194.478,117.635 194.478,114.135 ; 194.978,104.635 198.098,104.635 198.098,108.135 194.978,108.135 194.978,104.635 ; 196.478,95.135 196.478,98.635 199.598,98.635 199.598,95.135 196.478,95.135 ; 200.098,84.635 203.218,84.635 203.218,88.135 200.098,88.135 200.098,84.635 ; 203.978,114.135 207.098,114.135 207.098,117.635 203.978,117.635 203.978,114.135 ; 205.478,124.135 205.478,127.635 208.598,127.635 208.598,124.135 205.478,124.135 ; 205.598,95.135 205.598,98.635 208.718,98.635 208.718,95.135 205.598,95.135 ; 207.978,104.635 207.978,108.135 211.098,108.135 211.098,104.635 207.978,104.635 ; 209.478,124.135 212.598,124.135 212.598,127.635 209.478,127.635 209.478,124.135 ; 213.478,124.135 216.598,124.135 216.598,127.635 213.478,127.635 213.478,124.135 ; 213.978,114.135 217.098,114.135 217.098,117.635 213.978,117.635 213.978,114.135 ; 214.098,95.135 214.098,98.635 217.218,98.635 217.218,95.135 214.098,95.135 ; 217.478,124.135 220.598,124.135 220.598,127.635 217.478,127.635 217.478,124.135 ; 221.478,124.135 224.598,124.135 224.598,127.635 221.478,127.635 221.478,124.135 ; 222.098,95.135 222.098,98.635 225.218,98.635 225.218,95.135 222.098,95.135 ; 223.978,114.135 223.978,117.635 227.098,117.635 227.098,114.135 223.978,114.135 ; 227.598,84.635 230.718,84.635 230.718,88.135 227.598,88.135 227.598,84.635 ; 234.598,84.635 234.598,88.135 237.718,88.135 237.718,84.635 234.598,84.635 ; 242.098,84.635 242.098,88.135 245.218,88.135 245.218,84.635 242.098,84.635 ; 249.098,96.635 252.218,96.635 252.218,100.135 249.098,100.135 249.098,96.635 ; 249.098,102.135 252.218,102.135 252.218,105.635 249.098,105.635 249.098,102.135 ; 249.098,107.635 252.218,107.635 252.218,111.135 249.098,111.135 249.098,107.635 ; 249.098,113.135 249.098,116.635 252.218,116.635 252.218,113.135 249.098,113.135
  lines w0.5: 165.958,82.135 165.956,139.05 255.598,139.135 255.598,82.135 166.307,82.135 ; 166.307,92.635 255.598,92.635 ; 166.307,112.635 229.098,112.635 ; 166.307,122.25 255.598,122.25 ; 166.307,130.25 255.598,130.25 ; 188.598,112.635 188.598,122.135 ; 188.598,122.25 188.598,130.25 ; 229.307,92.635 229.307,122.25 229.307,130.25
  text "Spécification du circuit imprimé" at 185.098,134.635 h5
  text "Process de Fabrication : RoHS" at 196.098,131.635 h3
  text "Ep. CI.:" at 234.598,125.635 h3
  text "1,6mm" at 242.598,125.635 h3
  text "Nbre de couches :" at 167.098,125.135 h3
  text "2" at 185.598,125.135 h3
  text "2" at 206.348,124.885 h4
  text "4" at 214.298,124.835 h4
  text "5" at 218.498,124.835 h4
  text "6" at 222.398,124.835 h4
  text "3" at 210.498,124.735 h4
  text "CLASSE :" at 193.098,124.635 h4
  text "X" at 210.098,124.435 h3
  text "Epaiss. cuivre de base" at 196.098,119.135 h3
  text "FINITION :" at 238.098,118.635 h3
  text "MATIERE :" at 169.498,118.135 h3
  text "FR4" at 180.598,118.135 h3
  text "HTg : Tg  140° C" at 169.498,115.435 h3
  text "35µ" at 190.098,115.135 h3
  text "70µ" at 199.598,115.135 h3
  text "105µ" at 208.598,115.135 h3
  text "140µ" at 218.598,115.135 h3
  text "X" at 194.998,114.335 h3
  text "HAL" at 231.598,114.135 h3
  text "X" at 249.598,113.335 h3
  text "Vernis épargne :" at 167.598,109.635 h3
  text "Face Top" at 192.978,109.635 h3
  text "Face Bottom" at 203.978,109.635 h3
  text "NiAu" at 231.598,108.635 h3
  text "X" at 195.398,104.835 h3
  text "X" at 208.498,104.835 h3
  text "NiAu+ Contact" at 231.598,102.635 h3
  text "Couleur :" at 167.598,100.135 h3
  text "Vert" at 180.098,100.135 h3
  text "Noir" at 187.598,100.135 h3
  text "Noir Mat" at 194.098,100.135 h3
  text "Blanc" at 205.098,100.135 h3
  text "Rouge" at 212.598,100.135 h3
  text "Bleu" at 221.598,100.135 h3
  text "Argent" at 231.598,97.635 h3
  text "X" at 181.098,95.335 h3
  text "Sérigraphie :" at 167.598,89.635 h3
  text "Face Top" at 185.098,89.635 h3
  text "Face Bottom" at 196.098,89.635 h3
  text "Couleur :" at 215.598,89.635 h3
  text "Blanc" at 226.598,89.635 h3
  text "Noir" at 234.098,89.635 h3
  text "Jaune" at 241.098,89.635 h3
  text "X" at 187.598,84.835 h3
  text "X" at 228.098,84.835 h3
  text "PLAN DE DETOURAGE ET PERCAGE" at 163.606,-113.411 h4
  text ".Legend" at -50.419,-121.92 h2

## Text inside footprints (layer, text, board x,y; h text height)
P2: Top Overlay "1" at 0.538,48.895 h2.5 r270; Top Overlay "3" at 0.538,31.115 h2.5 r270; Cablage Top "3" at 0.538,31.115 h2.5 r270; Cablage Top "1" at 0.538,48.895 h2.5 r270
P3: Top Overlay "3" at 0.538,52.197 h2.5 r270; Top Overlay "1" at 0.538,64.77 h2.5 r270; Cablage Top "1" at 0.538,64.77 h2.5 r270; Cablage Top "3" at 0.538,52.197 h2.5 r270
P5: Top Overlay "1" at 48.895,54.64 h1.3 r270; Cablage Top "1" at 48.895,54.64 h1.3 r270
P6: Top Overlay "1" at 44.607,36.986 h1.3 r180; Cablage Top "1" at 44.607,36.986 h1.3 r180
P7: Top Overlay "1" at 67.437,34.163 h2.5; Top Overlay "8" at 66.802,45.847 h2.5; Cablage Top "1" at 67.437,34.163 h2.5; Cablage Top "8" at 66.802,45.847 h2.5
P8: Top Overlay "1" at 67.54,53.885 h2.5 r180; Top Overlay "8" at 67.54,62.885 h2.5 r180; Cablage Top "1" at 67.54,53.885 h2.5 r180; Cablage Top "8" at 67.54,62.885 h2.5 r180
P9: Top Overlay "1" at 64.77,72.644 h1.3 r90; Cablage Top "1" at 64.77,72.644 h1.3 r90